# Altium PCB top_blank.PcbDoc
Units mil, origin at the board's own origin, x right, y up, seen from the top; angles counter-clockwise.
Board outline 10250 x 6200 mil, 2 copper layers (Top Layer, Bottom Layer); 47 components, 27 nets, 167 pads, 3 vias.
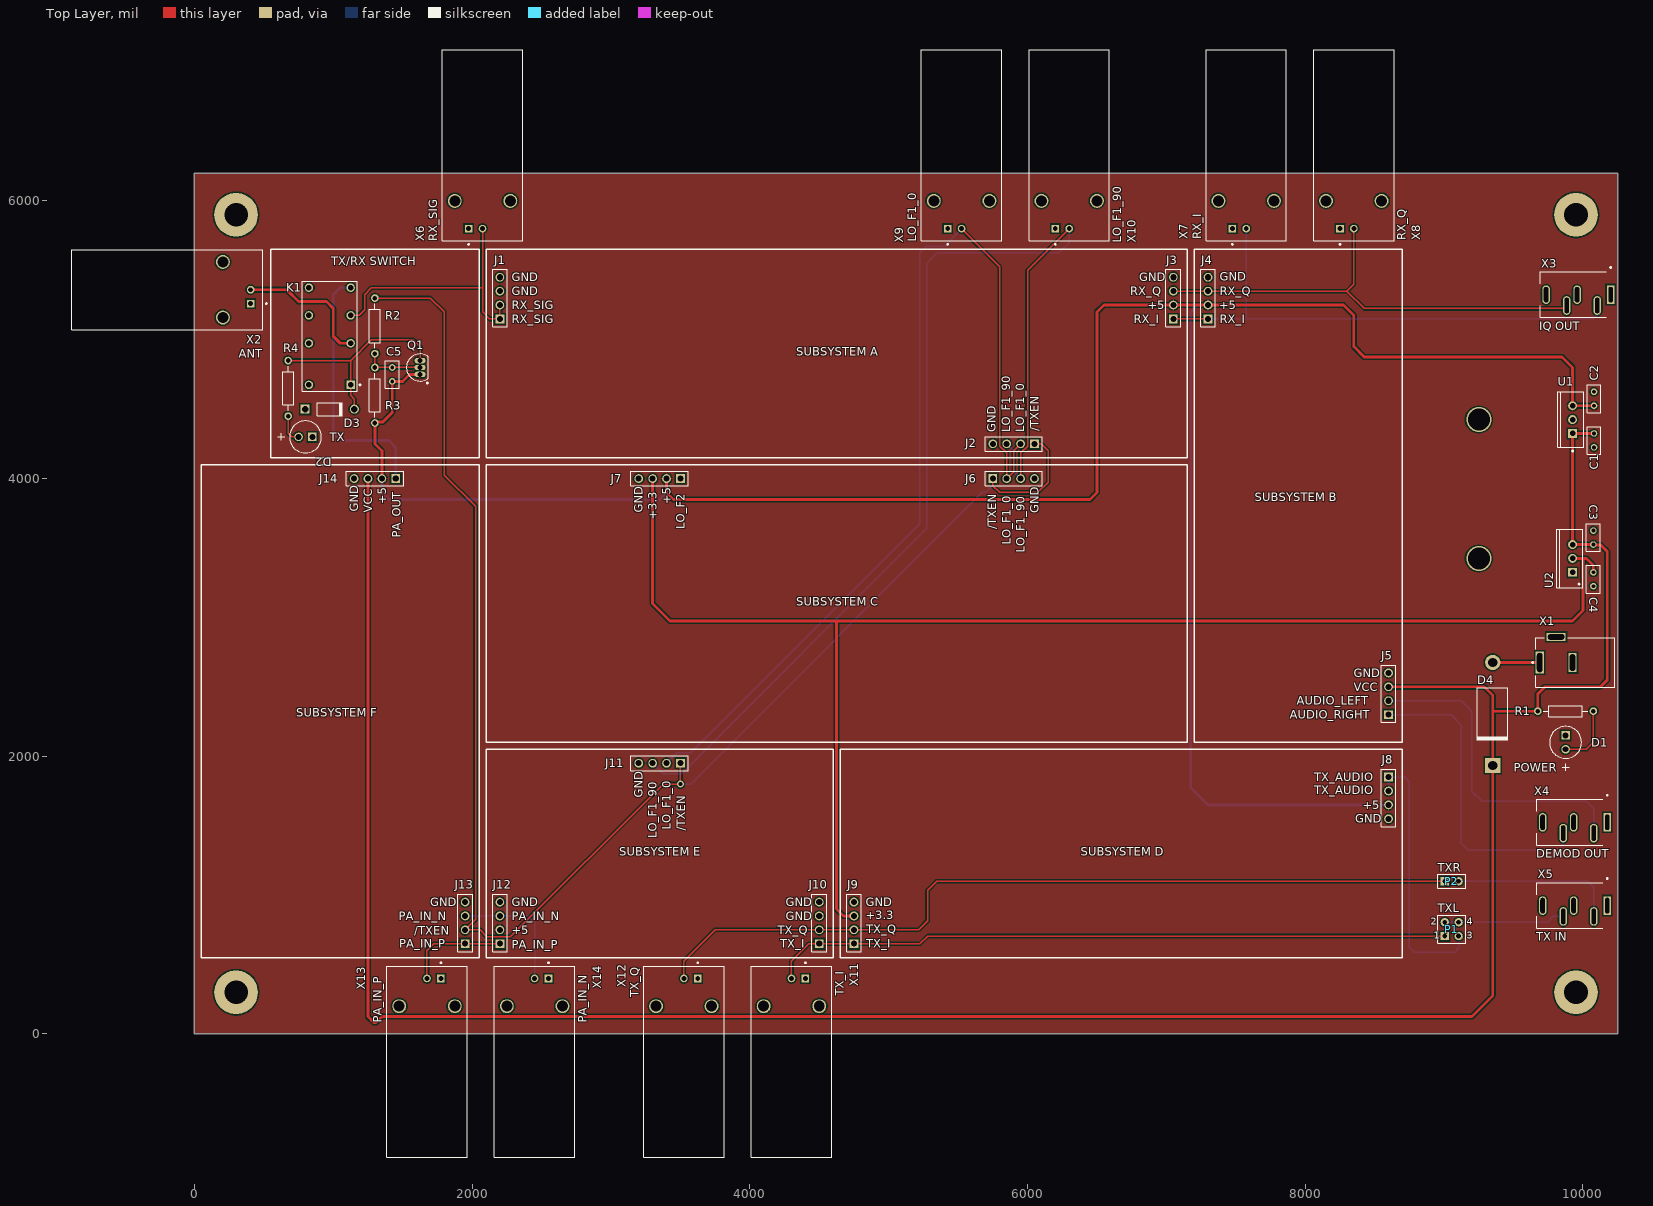
[diagram p0: Top Layer view]
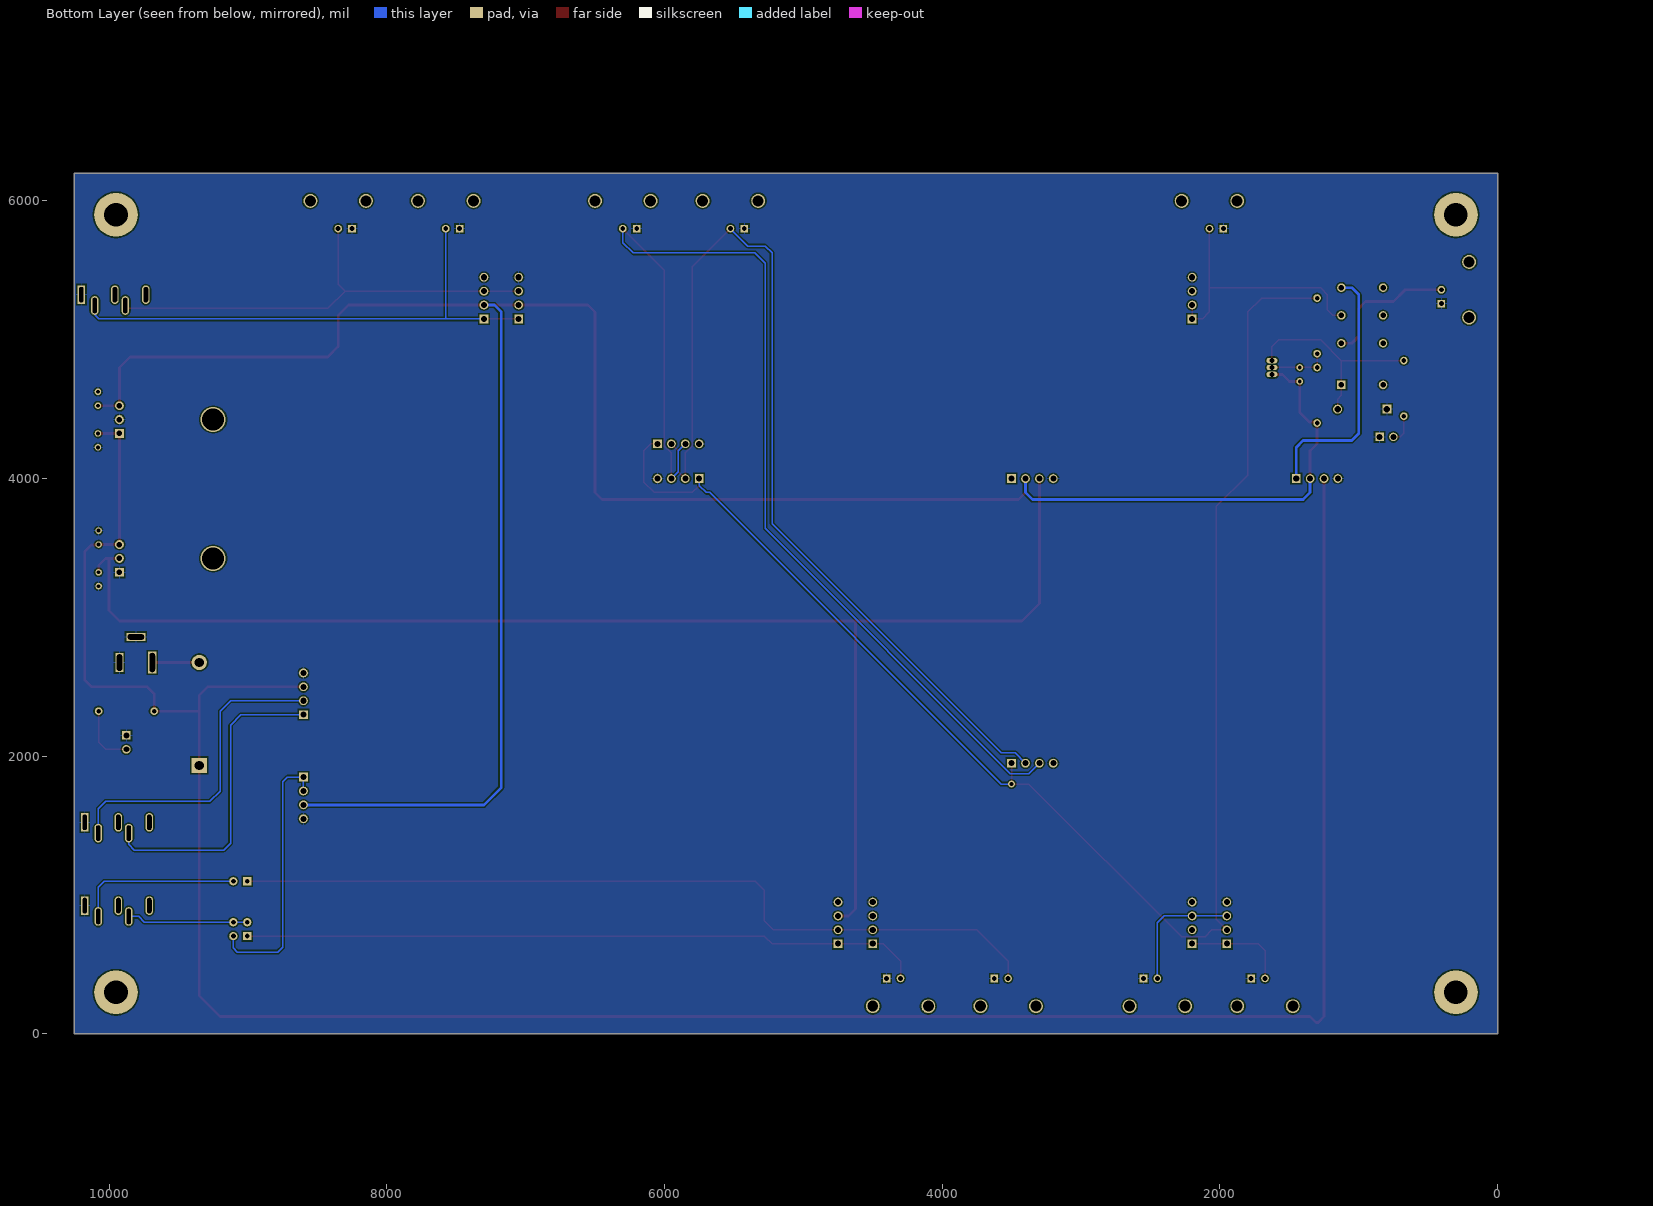
[diagram p1: Bottom Layer view, seen from below]
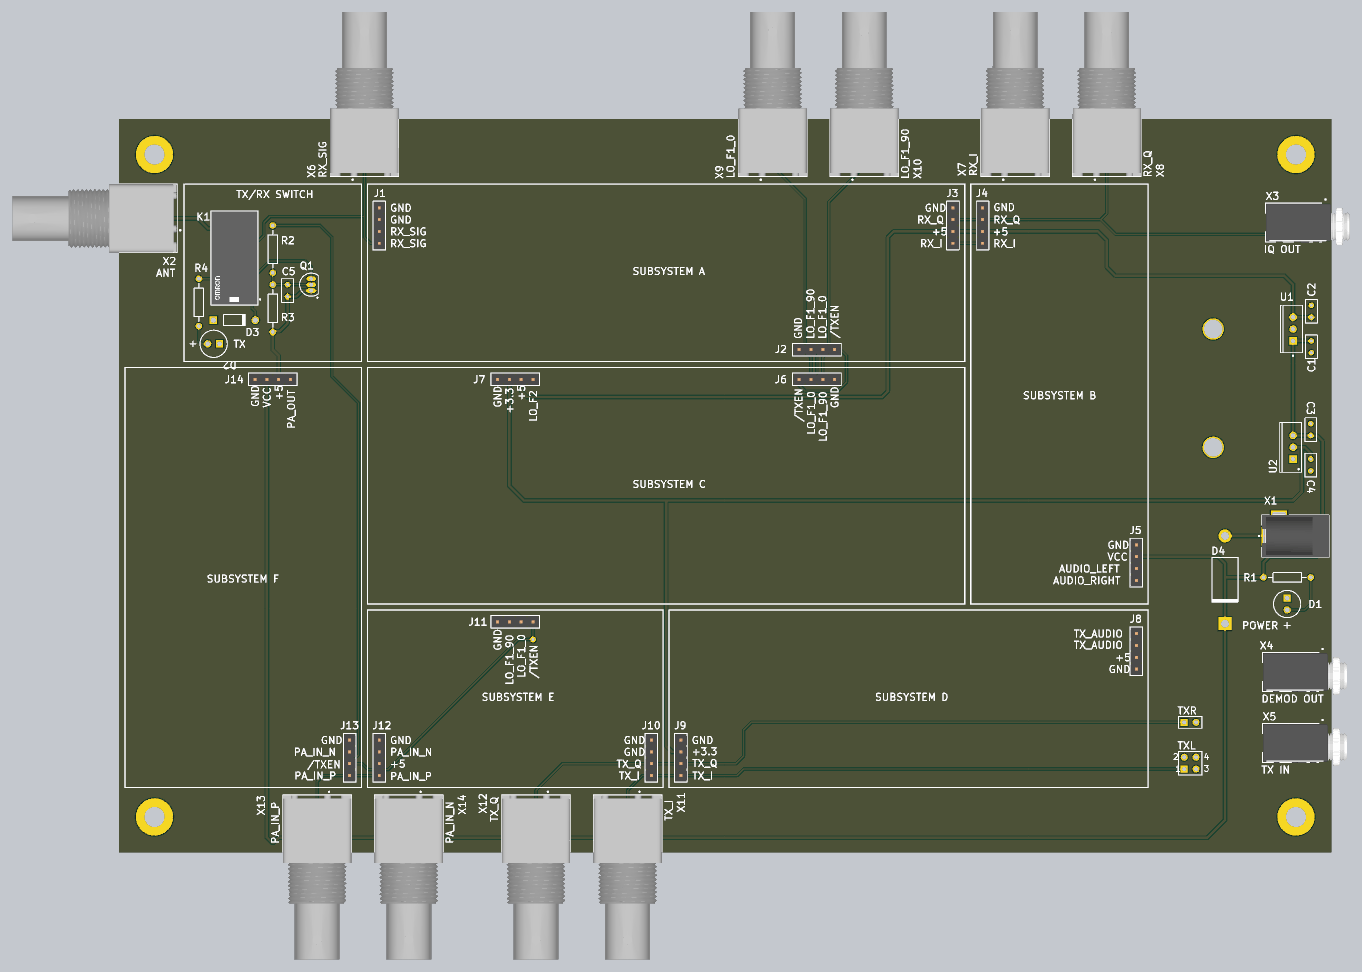
[diagram p2: 3D render of the assembled board from above, using the file's embedded part models]

## Layer stack, top to bottom
Top Solder: solder mask 0.4, Solder Resist, Dk 3.5
Top Layer: signal copper 1.4
Dielectric 1: dielectric 12.6, FR-4, Dk 4.8
Bottom Layer: signal copper 1.4
Bottom Solder: solder mask 0.4, Solder Resist, Dk 3.5

## Board outline
0,0 10250,0 10250,6200 0,6200

## Design rules (kind name [scope] priority, off if disabled: settings)
Clearance Clearance_1 [All] p1: gap=10 ignorepadtopadclearanceinfootprint=FALSE except(0: Arc-Hole Track-Hole SMDPad-Hole THPad-Hole Via-Hole Fill-Hole Poly-Hole Region-Hole Text-Hole)
Clearance [All] p2: gap=10 ignorepadtopadclearanceinfootprint=FALSE except(0: Arc-Hole Track-Hole SMDPad-Hole THPad-Hole Via-Hole Fill-Hole Poly-Hole Region-Hole Text-Hole)
HoleSize [All] p1: absolutevalues=TRUE maxlimit=200 minlimit=1 maxpercent=80.000 minpercent=20.000
PolygonConnect [All] p1: connectstyle=Relief reliefconductorwidth=10 reliefentries=4 polygonreliefangle="90 Angle" airgapwidth=10
RoutingVias [All] p1: holewidth=28 width=50 viastyle="Through Hole" minholewidth=28 minwidth=50 maxholewidth=28 maxwidth=50
SilkToSilkClearance [All] p1: silktosilkclearance=3.94
SilkToSolderMaskClearance [IsPad] p1: minsilkscreentomaskgap=7.87 clearancetoexposedcopper=TRUE
SolderMaskExpansion [All] p1: expansion=4 istentingtop=FALSE
SupplyNets "Schematic Supply Nets_3" [InNet('+5')] p1: voltage=0.000
SupplyNets "Schematic Supply Nets_2" [InNet('+3.3')] p2: voltage=0.000
SupplyNets "Schematic Supply Nets_1" [InNet('VCC')] p3: voltage=0.000
SupplyNets "Schematic Supply Nets" [InNet('GND')] p4: voltage=0.000
Width Width_1 [(InNet('+3.3') OR InNet('+5') OR InNet('VCC') OR InNet('ANT') or InNet('PA_OUT') or InNet('VIN'))] p1: maxlimit=20 minlimit=20 preferedwidth=20
Width [All] p2: maxlimit=10 minlimit=10 preferedwidth=10
27 further rules are at their usual default settings.

## Classes and differential pairs
component class SubB: J4 J5
component class TXRXswitch: C5 D2 D3 K1 Q1 R2 R3 R4
component class SubD: J8 J9
component class PowerReg: C1 C2 C3 C4 U1 U2
component class SubA: J1 J2 J3
component class SubE: J10 J11 J12
component class SubF: J13 J14
component class SubC: J6 J7
component class top_blank: D1 D4 P1 P2 R1 X1 X2 X3 X4 X5 X6 X7 X8 X9 X10 X11 X12 X13 X14

## Components (designator, comment, footprint, x,y, rotation, side; value= is the part's Value field where it differs from the comment)
C1 "Cap" RAD-0.1 10080,4275 r270 top value=0.22uF
C2 "Cap" RAD-0.1 10080,4575 r90 top value=0.1uF
C3 "Cap Pol1" RAD-0.1 10075,3575 r90 top value=10uF
C4 "Cap" RAD-0.1 10075,3275 r270 top value=0.1uF
C5 "Cap" RAD-0.1 1425,4750 r90 top value=100nF
D1 "POWER" AVAG-HLMP-3301-2 9875,2150 r270 top
D2 "TX" AVAG-HLMP-3301-2 850,4300 r180 top
D3 "1N4003" DIOD-DO-41-P-2_V 975,4500 r0 top
D4 "SB540A-E3/73" DO-201AD 9350,2305 r270 top
J1 "RF" 61300411121 2200,5300 r90 top
J2 "LO" 61300411121 5900,4250 r180 top
J3 "OUT" 61300411121 7050,5300 r90 top
J4 "IN" 61300411121 7300,5300 r90 top
J5 "IN" 61300411121 8600,2450 r90 top
J6 "LO_F1" 61300411121 5900,4000 r0 top
J7 "LO_F2" 61300411121 3350,4000 r180 top
J8 "IN" 61300411121 8600,1700 r270 top
J9 "OUT" 61300411121 4750,800 r90 top
J10 "IN" 61300411121 4500,800 r90 top
J11 "LO" 61300411121 3350,1950 r180 top
J12 "PA" 61300411121 2200,800 r90 top
J13 "IN" 61300411121 1950,800 r90 top
J14 "OUT" 61300411121 1300,4000 r180 top
K1 "G6A-2-H-DC5" FP-G6A-2-H-DC5-MFG 975,5025 r90 top
P1 "TXL" HDR2X2 9005,705 r0 top
P2 "TXR" HDR1X2 9005,1100 r0 top
Q1 "2N3906" TO-92A 1625,4800 r0 top
R1 "Res1" AXIAL-0.4 9875,2325 r180 top value=1k
R2 "Res1" AXIAL-0.4 1300,5100 r270 top value=3.3k
R3 "Res1" AXIAL-0.4 1300,4600 r270 top value=1k
R4 "Res1" AXIAL-0.4 675,4650 r90 top value=220
U1 "LM7805CT" FAIR-TO-220-3 9925,4425 r180 top
U2 "LM1117T-3.3" T03B 9925,3425 r90 top
X1 "PJ-002A" CUI-PJ-002A_V 9806.89,2675 r0 top
X2 "ANT" TECO-1-1337543-0_V 205,5360 r90 top
X3 "IQ OUT" FP-35RAPC4BV4-MFG 10050,5325 r180 top
X4 "DEMOD OUT" FP-35RAPC4BV4-MFG 10025,1525 r180 top
X5 "TX IN" FP-35RAPC4BV4-MFG 10025,925 r180 top
X6 "RX_SIG" TECO-1-1337543-0_V 2075,6000 r0 top
X7 "RX_I" TECO-1-1337543-0_V 7575,6000 r0 top
X8 "RX_Q" TECO-1-1337543-0_V 8350,6000 r0 top
X9 "LO_F1_0" TECO-1-1337543-0_V 5525,6000 r0 top
X10 "LO_F1_90" TECO-1-1337543-0_V 6300,6000 r0 top
X11 "TX_I" TECO-1-1337543-0_V 4300,200 r180 top
X12 "TX_Q" TECO-1-1337543-0_V 3525,200 r180 top
X13 "PA_IN_P" TECO-1-1337543-0_V 1675,200 r180 top
X14 "PA_IN_N" TECO-1-1337543-0_V 2450,200 r180 top

## Footprints (in the part's own frame and the unit in brackets; to place one, negate y for a bottom-side part, rotate by r counter-clockwise, add the part's x,y. Pads: shape width x height; smd on the part's side, far side on the other; paste and mask are expansions set on the pad)
61300411121 [mm] "Pin Header, pitch 2.54 mm, THT, Vertical, single row, 4p"
  rect 1.6x1.6 hole 1.1: 1(-3.81,0)
  round 1.6 hole 1.1: 2(-1.27,0) 3(1.27,0) 4(3.81,0)
  silkscreen extent -5.23,-1.35 5.23,1.35, body extent -5.08,-1.27 5.08,1.27, height 8.57
AVAG-HLMP-3301-2 [mm] "THD, 2-Leads, Body Dia 5.85mm"
  rect 1.55x1.55 hole 1.05: 1(0,0)
  round 1.55 hole 1.05: 2(2.54,0)
  silkscreen extent -1.65,-2.92 6.48,2.92
AXIAL-0.4 [mm] "Axial Device, Thru-Hole; 2 Leads; 0.4 in Pin Spacing"
  round 1.4 hole 0.85: 1(-5.08,0) 2(5.08,0)
  silkscreen extent -4.06,-1.02 4.06,1.02
CUI-PJ-002A_V [mm] "THD, 3-Leads, Body 14.4x9mm, Height 11mm"
  rect 1.5x4 hole 1 slot 3.5 at 90 deg: 1(-3,0)
  rect 1.5x3.5 hole 1 slot 3 at 90 deg: 2(3,0)
  rect 3.5x1.5 hole 1 slot 3 at 0 deg: 3(0,4.7)
  silkscreen extent -4.42,-4.5 10.7,4.5, body extent -3.7,-4.5 10.7,4.9, height 11
DIOD-DO-41-P-2_V [mm] "2-Leads, Axial Lead, Body 4.635x2.36mm, Pin Spacing 9mm"
  rect 1.65x1.65 hole 1.15: 1(-4.5,0)
  round 1.65 hole 1.15: 2(4.5,0)
  silkscreen extent -2.32,-1.18 2.32,1.18, body extent -4.93,-1.18 4.93,1.18, height 2.35
DO-201AD [mm] "Diode, Axial; Body 9.5 x 5.6 mm (LxDia. max), Lead Dia. 1.32 mm (max)"
  round 2.8 hole 1.7: 1(-9.42,0)
  rect 2.8x2.8 hole 1.7: 2(9.42,0)
  silkscreen extent -4.8,-2.8 4.9,2.8
FAIR-TO-220-3 [mm] "FM, 3-Leads, Body 10.2x4.7mm, Pitch 2.54mm"
  rect 1.6x1.6 hole 1: 1(0,2.54)
  round 1.6 hole 1: 2(0,0) 3(0,-2.54)
  silkscreen extent -2.04,-5.1 2.66,5.87, body extent -2.04,-5.1 2.66,5.1, height 18.95
FP-35RAPC4BV4-MFG [mm]
  rect 1.4x3.4 hole 2.8 slot 0.8 at 0 deg paste-2539.97 mask+0: 1(-3.81,0.013)
  rrect100% 1.4x3.4 hole 2.8 slot 0.8 at 0 deg paste-2539.97 mask+0: 2(-1.346,1.994) 3(2.337,0.013) 4(4.242,1.994) 5(8.001,0.013)
  silkscreen extent -3.93,-5.07 9.12,4.18, body extent -9.22,-4.28 9.22,4.28, height 0.25
FP-G6A-2-H-DC5-MFG [mm]
  rect 1.55x1.55 hole 1 paste-2539.97 mask+0: 1(-8.89,-3.81)
  round 1.55 hole 1 paste-2539.97 mask+0: 4(-1.27,-3.81) 6(3.81,-3.81) 8(8.89,-3.81) 9(8.89,3.81) 11(3.81,3.81) 13(-1.27,3.81) 16(-8.89,3.81)
  silkscreen extent -10.1,-5.66 10.1,5.05, body extent -10.2,-5.15 10.2,5.15, height 0.25
HDR1X2 [mm] "Connector; Header; 2 Position"
  rect 1.5x1.5 hole 0.9: 1(0,0)
  round 1.5 hole 0.9: 2(2.54,0)
  silkscreen extent -1.27,-1.27 3.81,1.27
HDR2X2 [mm] "Connector; Header; 2x2 Position"
  rect 1.5x1.5 hole 0.9: 1(0,0)
  round 1.5 hole 0.9: 2(0,2.54) 3(2.54,0) 4(2.54,2.54)
  silkscreen extent -1.27,-1.27 3.81,3.81
RAD-0.1 [mm] "Radial Cap, Thru-Hole; 2 Leads; 0.1 in Pin Spacing"
  round 1.2 hole 0.7: 1(-1.27,0) 2(1.27,0)
  silkscreen extent -2.54,-1.27 2.54,1.27
T03B [mm] "TO, Thru-Hole, Vertical, Heatsink Mounted; 3 In-Line Leads; Pitch 2.54 mm"
  rect 1.6x1.6 hole 1: 1(-2.54,0)
  round 1.6 hole 1: 2(0,0) 3(2.54,0)
  silkscreen extent -5.35,-1.85 5.35,2.85, body extent -5.4,-1.9 5.4,2.9, height 19.8
TECO-1-1337543-0_V [mm] "SMD, 2-Leads, Body 34.9x14.7mm, Pitch 2.54mm"
  rect 1.4x1.4 hole 0.89: 1(-2.54,-5.08)
  round 1.4 hole 0.89: 2(0,-5.08)
  round 2.55 hole 2.01: MH1(-5.08,0) MH2(5.08,0)
  silkscreen extent -7.35,-8.08 7.35,27.6, body extent -7.35,-7.1 7.35,28.05, height 15.8
TO-92A [mm] "TO, Flat Index; 3 In-Line, Axial Leads; Body Dia. 4.5mm; Leads 0.51 x 0.48 mm (max)"
  oval 2x1 hole 0.9: 1(0,-1.27) 2(0,0) 3(0,1.27)
  silkscreen extent -2.48,-2.95 1.5,2.48, body extent -2.48,-2.5 1.5,2.5, height 6.86

## Part data
C1 C2 C4 C5: "Capacitor", LatestRevisionDate=17-Jul-2002, LatestRevisionNote="Re-released for DXP Platform.", PackageDescription="Radial Cap, Thru-Hole; 2 Leads; 0.3 in Pin Spacing", PackageReference=RAD-0.3, Published=8-Jun-2000, Publisher="Altium Limited"
C3: "Polarized Capacitor (Radial)", LatestRevisionDate=17-Jul-2002, LatestRevisionNote="Re-released for DXP Platform.", PackageDescription="Polarized Capacitor (Radial); 2 Leads", PackageReference=RB7.6-15, Published=8-Jun-2000, Publisher="Altium Limited"
D1 D2: library part CMP-2000-06411-1, "T-1 3/4 (5 mm) Diffused LED Lamp, 1.9 V, -40 to 100 degC, 2-Pin THD, RoHS, Bulk", Emitting color=Red, Forward Current=25mA, Forward Voltage=2.4V, Manufacturer=Avago, Operating Temp Range=-40Cto100C, Operating Temperature Classification=Industrial, Package Description="2-Pin Through Hole LED, Dia 5.85 mm", Package Reference=HLMP-3301, Package Type=T-13/4, Power Dissipation=85W, Reverse Voltage=5V, Test Current (It)=10mA, Chip Material=GaP, Datasheet URL=http://www.avagotech.com/docs/AV02-1558EN, Datasheet Version=03/2015, DELETED=Compliant, Dominant Wave Length=626nm, High Brightness=No, Lens Dimensions=5.08x5.08x8.3mm, Lens Type=ColoredDiffused, Lum Intensity=5.4mcd, Luminous Intensity=5.4mcd, Main Category=StandardLED, Manufacturer URL=http://www.avagotech.com/, Mounting=ThroughHole, Mounting Technology=ThroughHole, Number of  Elements=1, Packaging=TapeandReel, Peak Wavelength=635nm, Pin Count=2, Product Depth (mm)=6.1mm, Product Height (mm)=9.19mm, Product Length (mm)=6.1mm, Rad Hardened=No, Shape Type=Circular, Type=Uni-Color, Viewing Angle=60deg
D3: library part CMP-0639-00004-2, "1.0 A Rectifier, 15 pF, 200 V, -65 to 150 degC, 2-Pin DO-41 Plastic, RoHS, Tape and Reel", Manufacturer="Diodes Inc", Max. Average Rectified Current IO (A)=1, Operating Temperature Range (degC)="-65 to 150", PartNumber=1N4003-T, ComponentLink1Description="Manufacturer URL", ComponentLink1URL=http://diodes.com/, ComponentLink2Description=Datasheet, ComponentLink2URL=http://diodes.com/datasheets/ds28002.pdf, CT (pF)=15, DatasheetVersion="Rev. 8-2", Max. IFSM (A)=30, Max. IR (uA)=5, Mounting Technology="Through Hole", PackageDescription="2-Pin Axial Lead, Body 4.635 x 2.36 mm, Lead Spread 25.4 mm", PackageReference=DO-41-P-2, Packing="Tape and Reel", RoHS=TRUE, VF (V)=1, VRRM (V)=200
D4: library part "Diode 1N5408", "3 Amp Medium Power Silicon Rectifier Diode", ComponentLink1Description="Manufacturer Link", ComponentLink1URL=http://www.irf.com/, DatasheetVersion=Aug-1984, LatestRevisionDate=17-Jul-2002, LatestRevisionNote="Re-released for DXP Platform.", PackageDescription="Diode, Axial; Body 9.5 x 5.3 mm (LxDia. max), Lead Dia. 1.32 mm (max)", PackageReference=DO-201AD, Published=8-Jun-2000, Publisher="Altium Limited"
J1 J2 J3 J4 J5 J6 J7 J8 J9 J10 J11 J12 J13 J14: library part CMP-1502-01064-1, "THT Vertical Pin Header WR-PHD, Pitch 2.54 mm, Single Row, 4 pins", Contact Resistance=20mOhm, Manufacturer="Wurth Elektronik", Operating Temperature=-40to105degC, Package Reference=61300411121, Rated Current=3A, Withstanding Voltage=500VAC, Working Voltage=250VAC, Datasheet URL=https://katalog.we-online.de/em/datasheet/6130xx11121.pdf, Gender=Male, Manufacturer URL=http://www.we-online.de, Mounting Technology=THT, Orientation=Vertical, Packaging=Bag, Part Number=61300411121, Pin Number=4, Pitch=2.54mm, Publisher=WurthElektronik, Row Number=Single
K1: library part CMP-08823-000040-1, "RELAY GEN PURPOSE DPDT 2A 5VDC", Coil Current=2A, Coil Voltage (DC)=5V, Package Quantity=25, Power Consumption=200mW, Coil Type=Non-Latching, Mount="Through Hole", Packaging=Bulk, Relay Type="General Purpose", Series=G6A, Termination="PC Pin", Throw Configuration=DPDT
P1: library part "Header 2X2", "Header, 2-Pin, Dual row", LatestRevisionDate=17-Jul-2002, LatestRevisionNote="Re-released for DXP Platform.", Publisher="Altium Limited"
P2: library part "Header 2", "Header, 2-Pin", LatestRevisionDate=17-Jul-2002, LatestRevisionNote="Re-released for DXP Platform.", Publisher="Altium Limited"
Q1: "PNP General Purpose Amplifier", ComponentLink1Description="Manufacturer Link", ComponentLink1URL=http://www.fairchildsemi.com/, ComponentLink2Description=Datasheet, ComponentLink2URL=http://www.fairchildsemi.com/ds/2N%2F2N3906.pdf, DatasheetVersion=1997, LatestRevisionDate=15-Jan-2003, LatestRevisionNote="PCB Footprint 'BCY-W3/D4.7' replaced", PackageDescription="TO, Flat Index; 3 In-Line, Axial Leads; Body Dia. 4.5mm; Leads 0.51 x 0.48 mm (max)", PackageReference=TO-92A, PackageVersion=Sep-1998, Published=8-Jun-2000, Publisher="Altium Limited"
R1 R2 R3 R4: "Resistor", LatestRevisionDate=17-Jul-2002, LatestRevisionNote="Re-released for DXP Platform.", PackageDescription="Axial Device, Thru-Hole; 2 Leads; 0.3 in Pin Spacing", PackageReference=AXIAL-0.3, Published=8-Jun-2000, Publisher="Altium Limited"
U1: library part CMP-2000-04938-1, "Positive Voltage Regulator, 5 V, 1 A, -40 to 125 degC, 3-Pin TO-220, RoHS, Tube", Manufacturer=FairchildSemiconductor, Maximum Input Voltage=35V, Maximum Output Current=2.2(Typ)A, Maximum Quiescent Current=8mA, Operating Temperature=-40to125degC, Output Voltage=5V, Package=3TO-220AB, Package Description="3-Pin Through Hole Device, Body 10 x 4.5 mm, Pitch 2.54 mm", Package Reference=TO-220, Typical Dropout Voltage @ Current=2@1AV, Accuracy=±4%, Category=LinearRegulator, Datasheet URL=https://datasheet.ciiva.com/26904/lm7805ct-26904988.pdf, Datasheet Version=Aug-12, Line Regulation=100mV, Load Regulation=100mV, Manufacturer URL=https://www.fairchildsemi.com/, Mounting=ThroughHole, Number of Outputs=1, Output Type=Fixed, Package URL=https://www.fairchildsemi.com/package-drawings/TO/TO220B03.pdf, Packaging=Rail/Tube, Polarity=Positive, Rad Hard=No, Type=Linear
U2: library part CMP-0062-02490-2, "800mA Low-Dropout Linear Regulator, 3-pin TO-220", Manufacturer="National Semiconductor", PackageTopMarking=NSUZXYTTE#*LM1117T*3.3, PowerWise=N, ComponentLink1Description="LM1117 Datasheet", ComponentLink1URL=http://www.national.com/ds/LM/LM1117.pdf, ComponentLink2Description="LM1117 Web Page", ComponentLink2URL=http://www.national.com/pf/LM/LM1117.html, ComponentLink3Description="T03B Package Page", ComponentLink3URL=http://www.national.com/packaging/folders/t03b.html, CompType="LDO IC", DatasheetVersion=Apr-2006, PackageDescription="TO-220, Molded, 3 Lead, Straight", PackageReference=T03B, PackageVersion="revL, Jan-1992", PinCount=3, RevisionNote="Component URLs added", RoHS=N
X1: library part CMP-2000-06895-1, "Through Hole Right Angle DC Power Jack, 2.5 A, 2 mm Center Pin, 3 Position, -25 to 85 degC, RoHS, Bulk", Current Rating=2.5A, Flammability Rating=UL94V-0, Insulation Resistance=50MOhms, Manufacturer=CUIInc., Operating Temperature Range=-25Cto+85C, Package Description="3-Pin Through Hole Device, Body 14.4 x 9 mm, Height 11 mm", Voltage Rating=24V, Brand=CUI, Connector Type=DCPowerJack, Contact Gender=Male, Contact Material=Copper, Contact Plating=Nickel, Datasheet URL=http://www.cui.com/product/resource/pj-002a.pdf, Datasheet Version="Rev. 1.03, 04/2016", Factory Pack Quantity=500, Housing Material=PolybutyleneTerephthalate(PBT), Inside Contact Diameter=2mm, Manufacturer URL=http://www.cui.com/, Mounting Angle=Right, Mounting Style=ThroughHole, Mounting Technology=ThroughHole, Outside Contact Diameter=6.5mm, Package Reference=PJ-002A, Product=Jacks, Product Category=DCPowerConnectors, RoHS=True, Termination Style=ThroughHole
X2 X6 X7 X8 X9 X10 X11 X12 X13 X14: library part CMP-2000-05853-1, "Female Connector, Pitch 2.54 mm, 1 x 2 Position, Height 15.8 mm, Tail Length 3.8 mm,  / -55 to 85 degC, RoHS, Bulk", Frequency Max=4GHz, Manufacturer="TE Connectivity", Package Description="Female Connector, Pitch 2.54 mm, 1 x 2 Position, Height 15.8 mm, Tail Length 3.8 mm", Package Reference=1-1337543-0, Coaxial Cable Types=-, Coaxial Termination=Solder, Connector Body Style=RightAngleJack, Connector Mounting=PCBMount, Connector Type=BNCCoaxial, Contact Material=Brass, Contact Plating=GoldPlatedContacts, Datasheet URL=http://www.te.com/commerce/DocumentDelivery/DDEController?Action=showdoc&DocId=Customer+Drawing%7F1337543%7FG%7Fpdf%7FEnglish%7FENG_CD_1337543_G.pdf%7F1-1337543-0, Datasheet Version="Rev. G, 12/2012", Impedance=50ohm, Manufacturer URL=http://www.te.com/, Mounting Technology=ThroughHole, Product Range=-, SVHC=ToBeAdvised
X3 X4 X5: library part CMP-47983-000001-1, "CONN JACK STEREO 3.5MM R/A", Manufacturer=Switchcraft, Manufacturer Part Number=35RAPC4BV4, Automotive=No, Category=Conn, ComponentLink2Description=Datasheet, ComponentLink2URL=http://www.switchcraft.com/Drawings/35rapc__v4_cd.pdf, Conn Orientation="Right Angle", Contact Material=Silver, Device Class L1=Connectors, Device Class L2="Audio / Video Connectors", Device Class L3=unset, Digikey Description="CONN JACK STEREO 3.5MM R/A", Height=0.495inch, Lead Free=Yes, Mouser Description="Phone Connectors 3.5MM VERT STEREO JK", Number Of Contacts=5, Obsolete Part=true, Octopart=https://octopart.com/35rapc4bv4-switchcraft-223606, Package=35RAPC4BV4, RoHS=TRUE

## Free pads (board coordinates)
  round 314.96 hole 170 unplated: 2(9950,300) 3(300,300) 4(300,5900) 5(9950,5900)

## Via types
v1: diameter 180, hole 158, Top Layer to Bottom Layer, 2 vias
v2: diameter 50, hole 28, Top Layer to Bottom Layer, 1 vias

## Nets (pads, with @x,y where several pads share a name; then routed paths per layer and width w, separated by ;. In a path a pad name is that pad's centre, name@x,y a point inside that pad or via, vN(x,y) a via of type N, cw(c..) or ccw(c..) an arc to the next point about the centre after c; other vN are vias at no path point)
+3.3: C4.1 J7.3 J9.3 U2.2 | length 10499.3
  Top Layer w20: J7.3 3300,3100 3425,2975 4625,2975 ; J9.3 4675,850 4625,900 4625,2975 ; U2.2 10000,3425 ; C4.1 10075,3375 10025,3425 10000,3425 ; 4625,2975 9925,2975 10000,3050 10000,3425
+5: C2.1 C5.1 J3.2 J4.2 J7.2 J8.3 J12.2 J14.2 Q1.1 R3.2 U1.3 | length 17105.5
  Top Layer w20: J14.2 1350,4200 1300,4250 R3.2 1306.72,4406.72 1356.72,4406.72 1425,4475 C5.1 1500,4700 1550,4750 Q1.1 ; J7.2 3400,3900 3450,3850 6450,3850 6500,3900 6500,5200 6550,5250 J3.2 J4.2 8275,5250 8350,5175 8350,4950 8425,4875 9850,4875 9925,4800 U1.3 C2.1 C2.1@10088.82,4525
  Bottom Layer w20: J14.2 1350,3900 1400,3850 3350,3850 3400,3900 J7.2 ; J4.2 7225,5250 7175,5200 7175,1775 7300,1650 J8.3
ANT: K1.4 X2.2 | length 996.6
  Top Layer w20: X2.2 665,5360 750,5275 950,5275 1000,5225 1000,5025 1050,4975 K1.4
AUDIO_LEFT: J5.2 X4.2 | length 2312.6
  Bottom Layer w10: J5.2 9125,2400 9200,2325 9200,1750 9275,1675 10025,1675 10078,1622 X4.2
AUDIO_RIGHT: J5.1 X4.4 | length 2257.6
  Bottom Layer w10: J5.1 9050,2300 9125,2225 9125,1375 9175,1325 9817.54,1325 9858,1365.46 X4.4
GND: C1.2 C2.2 C3.2 C4.2 D1.1 D2.1 D3.1 J1.3 J1.4 J2.4 J3.4 J4.4 J5.4 J6.4 J7.4 J8.4 J9.4 J10.3 J10.4 J11.4 J12.4 J13.4 J14.4 K1.16 U1.2 U2.1 X1.2 X1.3 X2.1 X3.1 X4.1 X5.1 X6.1 X7.1 X8.1 X9.1 X10.1 X11.1 X12.1 X13.1 X14.1 | length 0
LO_F1_0: J2.2 J6.2 J11.2 X9.2 | length 7088
  Top Layer w10: X9.2 5800,5525 5800,5500 5800,4234.24 5850,4184.24 J6.2 5900,4050 5900,4200 J2.2
  Bottom Layer w10: J11.2 3475,2025 3575,2025 5225,3675 5225,5625 5275,5675 5400,5675 X9.2
LO_F1_90: J2.3 J6.3 J11.3 X10.2 | length 8077.6
  Top Layer w10: J6.3 5950,4184.24 6000,4234.24 6000,5475 6000,5500 X10.2
  Bottom Layer w10: J11.3 3375,1875 3509.21,1875 5275,3640.79 5275,5550 5350,5625 6225,5625 6300,5700 X10.2 ; J2.3@5850,4242.65 J2.3 5900,4200 5900,4050 J6.3
LO_F2: J7.1
NetC5_2: C5.2 Q1.2 R2.2 R3.1 | length 425
  Top Layer w10: R2.2 R3.1 C5.2 Q1.2
NetD1_2: D1.2 R1.1 | length 445.7
  Top Layer w10: D1.2 10025,2050 10075,2100 R1.1
NetD2_2: D2.2 R4.1 | length 210.4
  Top Layer w10: R4.1 675,4325 700,4300 D2.2
NetD3_2: D3.2 K1.1 Q1.3 R4.2 | length 1494.1
  Top Layer w10: R4.2 1125,4850 ; D3.2 1152.17,4572.83 1125,4600 K1.1 1125,4850 ; Q1.3 1625,4950 1575,5000 1275,5000 1125,4850
NetJ8_1: J8.1 J8.2 P1.3 | length 1921.4
  Bottom Layer w10: J8.2 J8.1 8715,1850 8750,1815 8750,625 8785,590 9075,590 9105,620 P1.3
PA_IN_N: J12.3 J13.3 X14.2 | length 920.7
  Bottom Layer w10: J13.3 J12.3 2400,850 2450,800 X14.2
PA_IN_P: J12.1 J13.1 X13.2 | length 783.2
  Top Layer w10: X13.2 1675,600 1725,650 J13.1 J12.1 J12.1@2173.5,623.5
PA_OUT: J14.1 K1.8 | length 1862.1
  Bottom Layer w20: K1.8 1050,5375 1000,5325 1000,4325 1050,4275 1400,4275 1450,4225 J14.1
RX_I: J3.1 J4.1 X3.2 X7.2 | length 3783.1
  Top Layer w10: J3.1 J4.1 ; X3.2@10100,5243.5 X3.2
  Bottom Layer w10: J4.1 7575,5150 ; X7.2 7575,5150 ; X3.2@10100,5243.5 10100,5175 10075,5150 7575,5150
RX_Q: J3.3 J4.3 X3.4 X8.2 | length 3364.8
  Top Layer w10: J3.3 J4.3 8300,5350 ; X8.2 8350,5400 8300,5350 ; X3.4@9862.16,5225 8425,5225 8300,5350
  Bottom Layer w10: X3.4@9862.16,5225 9883,5245.84 X3.4
RX_SIG: J1.1 J1.2 K1.6 X6.2 | length 1942.5
  Top Layer w10: K1.6 1127.92,5177.92 1187.16,5177.92 1225,5215.76 1225,5325 1275,5375 2075,5375 ; X6.2 2075,5375 ; J1.2 J1.1 2125,5150 2075,5200 2075,5375
TX_AUDIO_L: P1.2 P1.4 X5.4 | length 870.2
  Bottom Layer w10: P1.2 P1.4 9745,805 9786.5,846.5 X5.4
TX_AUDIO_R: P2.2 X5.2 | length 1201.3
  Bottom Layer w10: P2.2 10035,1100 10078,1057 X5.2
TX_I: J9.1 J10.1 P1.1 X11.2 | length 4904.6
  Top Layer w10: X11.2 4300,525 4425,650 J10.1 J9.1 5225,650 5280,705 P1.1
TX_Q: J9.2 J10.2 P2.1 X12.2 | length 5972
  Top Layer w10: X12.2 3525,525 3750,750 J10.2 5215,750 5280,815 5280,1035 5345,1100 P2.1
TXEN: J2.1 J6.1 J11.1 J13.2 R2.1 | length 11352.2
  Top Layer w10: R2.1 1700,5300 1800,5200 1800,4025 2025,3800 2025,825 J13.2 2057.17,750 2107.17,700 2275,700 3375,1800 v2(3500,1800) J11.1 ; J6.1 5750,3950 5800,3900 6075,3900 6150,3975 6150,4200 6100,4250 J2.1
  Bottom Layer w10: v2(3500,1800) 3575,1800 5675,3900 5700,3900 5750,3950 J6.1 J6.1@5734.36,3984.36
VCC: C1.1 C3.1 D4.2 J5.3 J14.3 R1.2 U1.1 U2.3 | length 18149.5
  Top Layer w20: J14.3 1250,125 1291.72,83.28 1308.28,83.28 1350,125 9200,125 9350,275 D4.2@9350,1930 ; J5.3 9290,2500 9350,2440 9350,2325 ; D4.2 9350,2325 ; C1.1 U1.1 U2.3 C3.1 10078.62,3521.38 10128.62,3521.38 10175,3475 10175,2550 10125,2500 9725,2500 9675,2450 R1.2 9350,2325
VIN: D4.1 X1.1 | length 339.1
  Top Layer w20: D4.1 9687.91,2675.87 X1.1
pads on no net: K1.9 K1.11 K1.13 X2.MH1 X2.MH2 X3.3 X3.5 X4.3 X4.5 X5.3 X5.5 X6.MH1 X6.MH2 X7.MH1 X7.MH2 X8.MH1 X8.MH2 X9.MH1 X9.MH2 X10.MH1 X10.MH2 X11.MH1 X11.MH2 X12.MH1 X12.MH2 X13.MH1 X13.MH2 X14.MH1 X14.MH2
copper on no net:
  other v1: 9250,3425 9250,4425

## Polygon pours and split planes (outlines as drawn)
+5 on Top Layer "+5_L01_P003" (solid, pour order 3): 0,0 10250,0 10250,6200 0,6200
GND on Bottom Layer "GND_L02_P005" (solid, pour order 5): 0,0 10250,0 10250,6200 0,6200

## Silkscreen, mask and mechanical layers (free items; w line width, h text height)
Top Overlay:
  lines w10: 50,550 50,4100 2050,4100 2050,550 50,550 ; 550,4150 550,5650 2050,5650 2050,4150 550,4150 ; 2100,550 2100,2050 4600,2050 4600,550 2100,550 ; 2100,2100 2100,4100 7150,4100 7150,2100 2100,2100 ; 2100,4150 7150,4150 7150,5650 2100,5650 2100,4150 ; 4650,550 8700,550 8700,2050 4650,2050 4650,550 ; 7200,2100 7200,5650 8700,5650 8700,2100 7200,2100
  text "TX/RX SWITCH" at 985,5535 h60
  text "GND" at 7385,5425 h60
  text "GND" at 2285,5420 h60
  text "GND" at 6805,5420 h60
  text "GND" at 2285,5320 h60
  text "RX_Q" at 6740,5320 h60
  text "RX_Q" at 7385,5320 h60
  text "RX_SIG" at 2285,5220 h60
  text "+5" at 6865,5220 h60
  text "+5" at 7380,5220 h60
  text "RX_SIG" at 2285,5120 h60
  text "RX_I" at 6765,5120 h60
  text "RX_I" at 7385,5120 h60
  text "SUBSYSTEM A" at 4335,4885 h60
  text "/TXEN" at 6080,4340 h60 r90
  text "GND" at 5770,4335 h60 r90
  text "LO_F1_90" at 5875,4335 h60 r90
  text "LO_F1_0" at 5975,4335 h60 r90
  text "SUBSYSTEM B" at 7635,3835 h60
  text "+5" at 1380,3815 h60 r90
  text "+5" at 3430,3815 h60 r90
  text "GND" at 1180,3760 h60 r90
  text "VCC" at 1280,3755 h60 r90
  text "GND" at 3230,3755 h60 r90
  text "GND" at 6080,3750 h60 r90
  text "+3.3" at 3330,3705 h60 r90
  text "LO_F2" at 3530,3635 h60 r90
  text "/TXEN" at 5775,3635 h60 r90
  text "PA_OUT" at 1485,3575 h60 r90
  text "LO_F1_0" at 5880,3525 h60 r90
  text "LO_F1_90" at 5980,3465 h60 r90
  text "SUBSYSTEM C" at 4335,3085 h60
  text "GND" at 8350,2570 h60
  text "VCC" at 8350,2470 h60
  text "AUDIO_LEFT" at 7940,2370 h60
  text "SUBSYSTEM F" at 735,2285 h60
  text "AUDIO_RIGHT" at 7890,2270 h60
  text "TX_AUDIO" at 8065,1820 h60
  text "TX_AUDIO" at 8065,1725 h60
  text "GND" at 3230,1700 h60 r90
  text "+5" at 8415,1620 h60
  text "GND" at 8360,1520 h60
  text "LO_F1_0" at 3430,1470 h60 r90
  text "/TXEN" at 3535,1465 h60 r90
  text "LO_F1_90" at 3330,1410 h60 r90
  text "SUBSYSTEM E" at 3060,1285 h60
  text "SUBSYSTEM D" at 6385,1285 h60
  text "GND" at 1700,920 h60
  text "GND" at 2285,920 h60
  text "GND" at 4260,920 h60
  text "GND" at 4835,920 h60
  text "+3.3" at 4835,825 h60
  text "PA_IN_N" at 1470,820 h60
  text "PA_IN_N" at 2285,820 h60
  text "GND" at 4260,820 h60
  text "TX_Q" at 4840,725 h60
  text "+5" at 2285,720 h60
  text "TX_Q" at 4200,720 h60
  text "/TXEN" at 1585,715 h60
  text "PA_IN_P" at 1475,620 h60
  text "TX_I" at 4220,620 h60
  text "TX_I" at 4840,620 h60
  text "PA_IN_P" at 2285,615 h60
Mechanical 1:
  the board outline again, w10
Mechanical 13:
  the board outline again, w19.68

## Dimensions
0,-250 to 10250,0 on Mechanical 15
8775,0 to 10250,6200 on Mechanical 15

## Text inside footprints (layer, text, board x,y; h text height)
P1: Top Overlay "1" at 8925,685 h50; Top Overlay "2" at 8905,785 h50; Top Overlay "4" at 9165,785 h50; Top Overlay "3" at 9165,685 h50